# EAGLE board strobe_dsssssssssssssssss (EAGLE 6.3), part 1 of 2
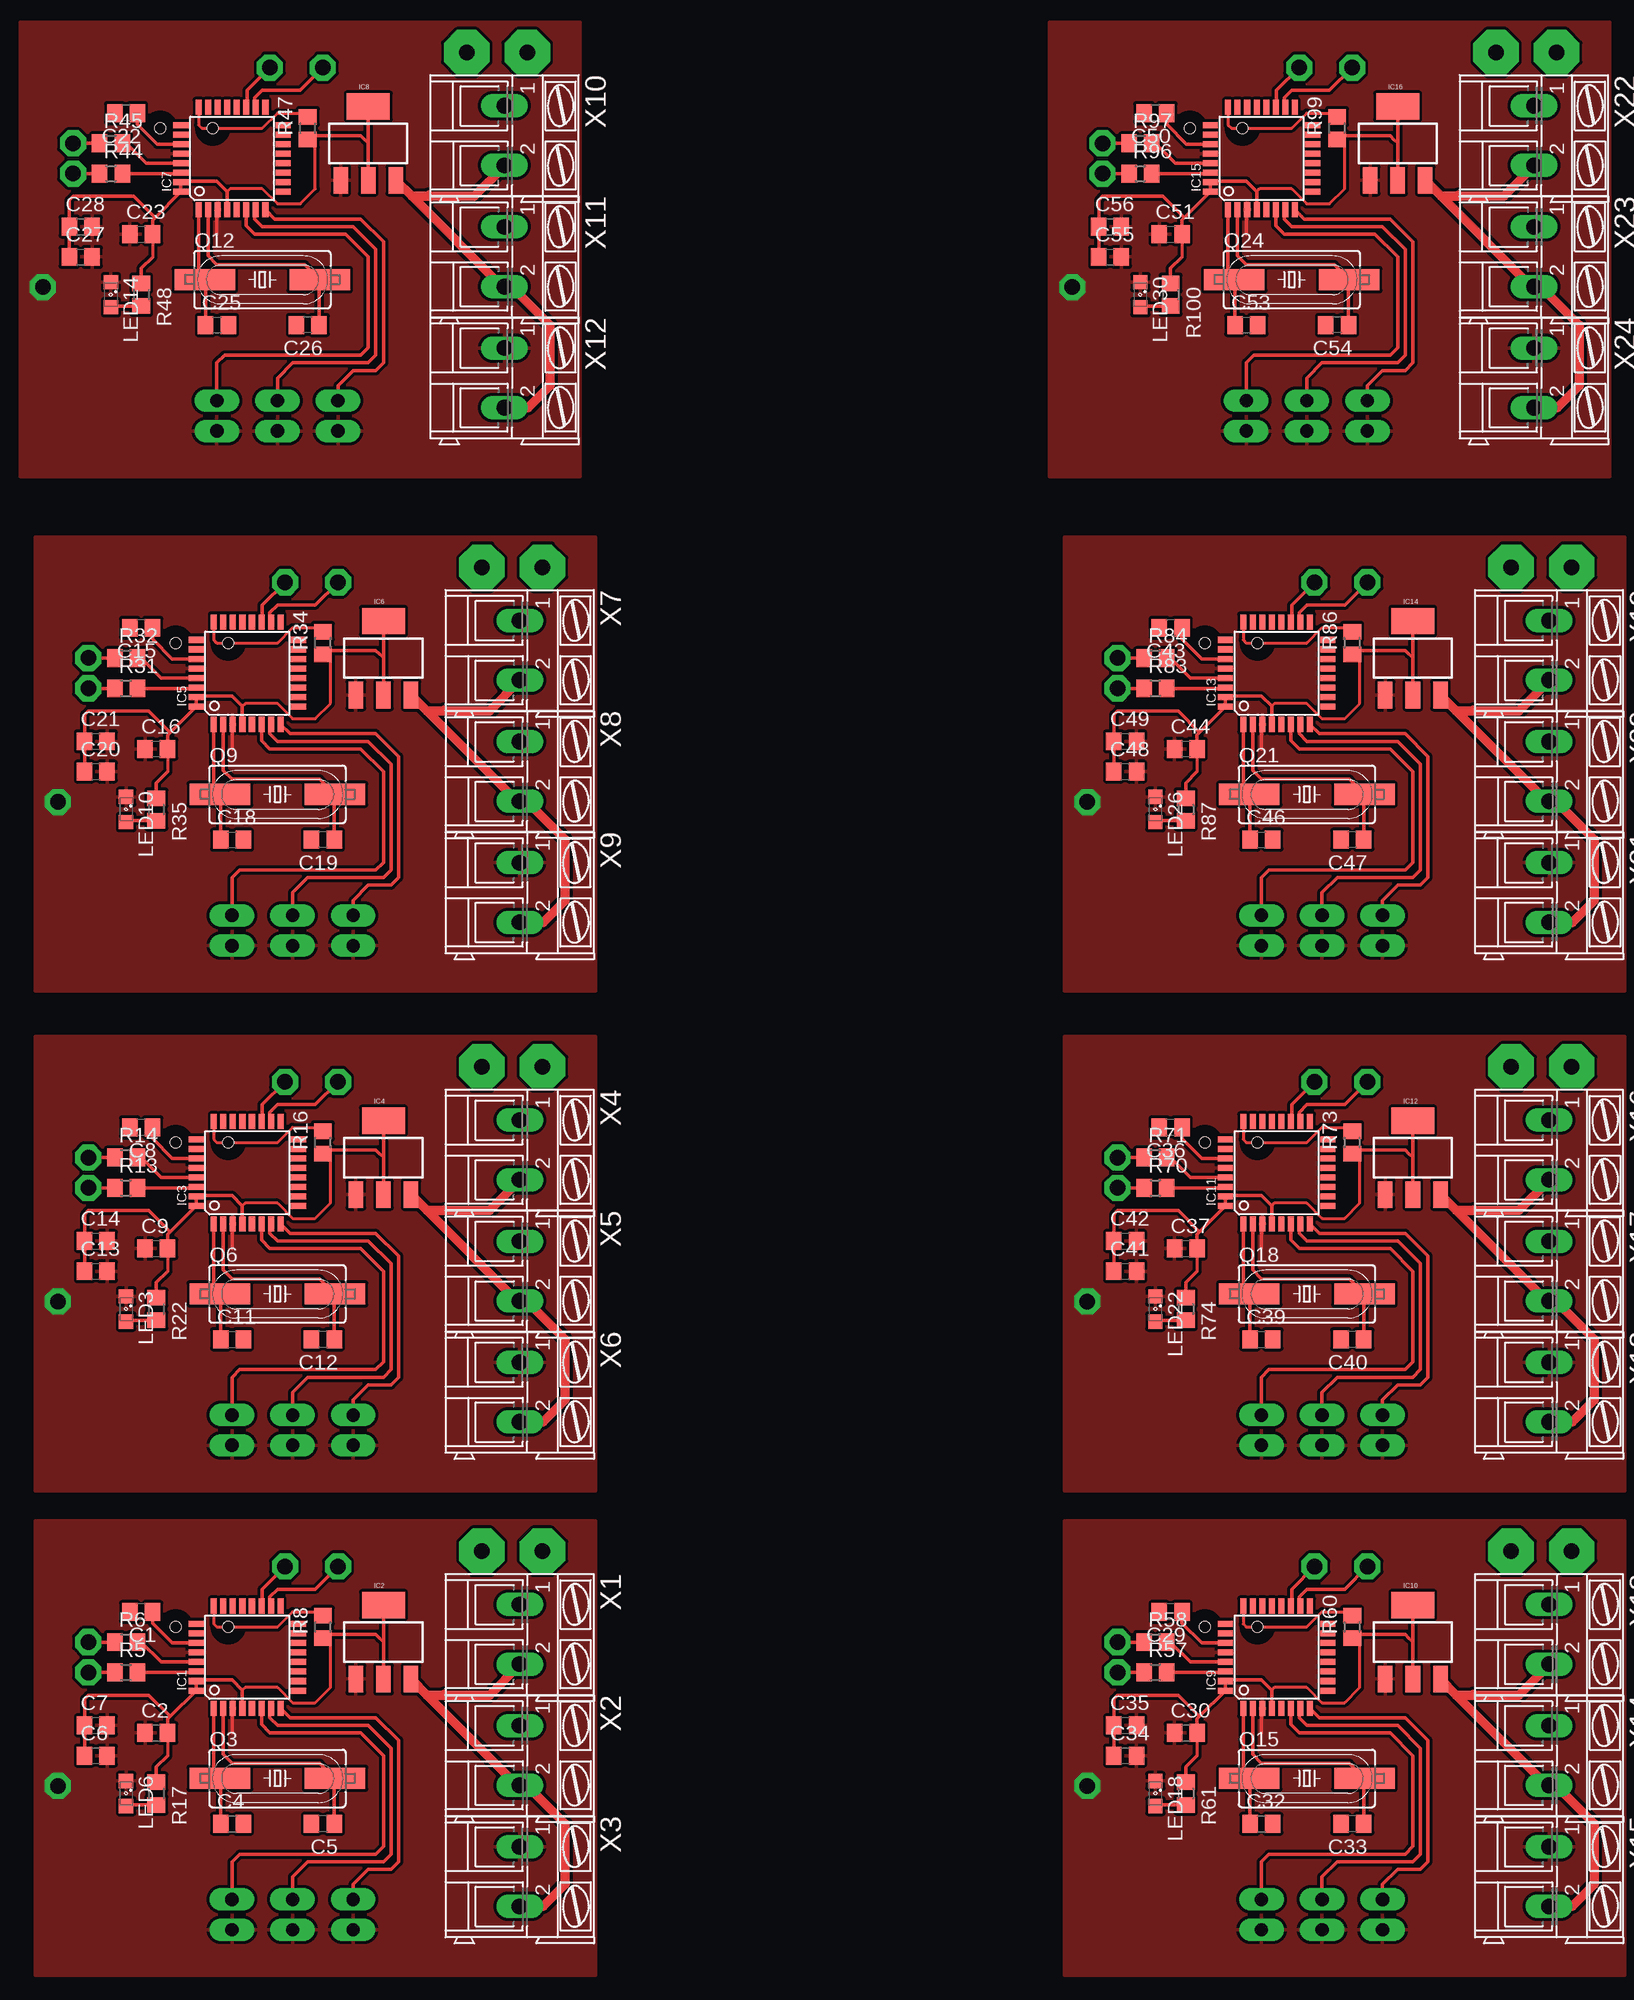
[diagram p0: board, top side]
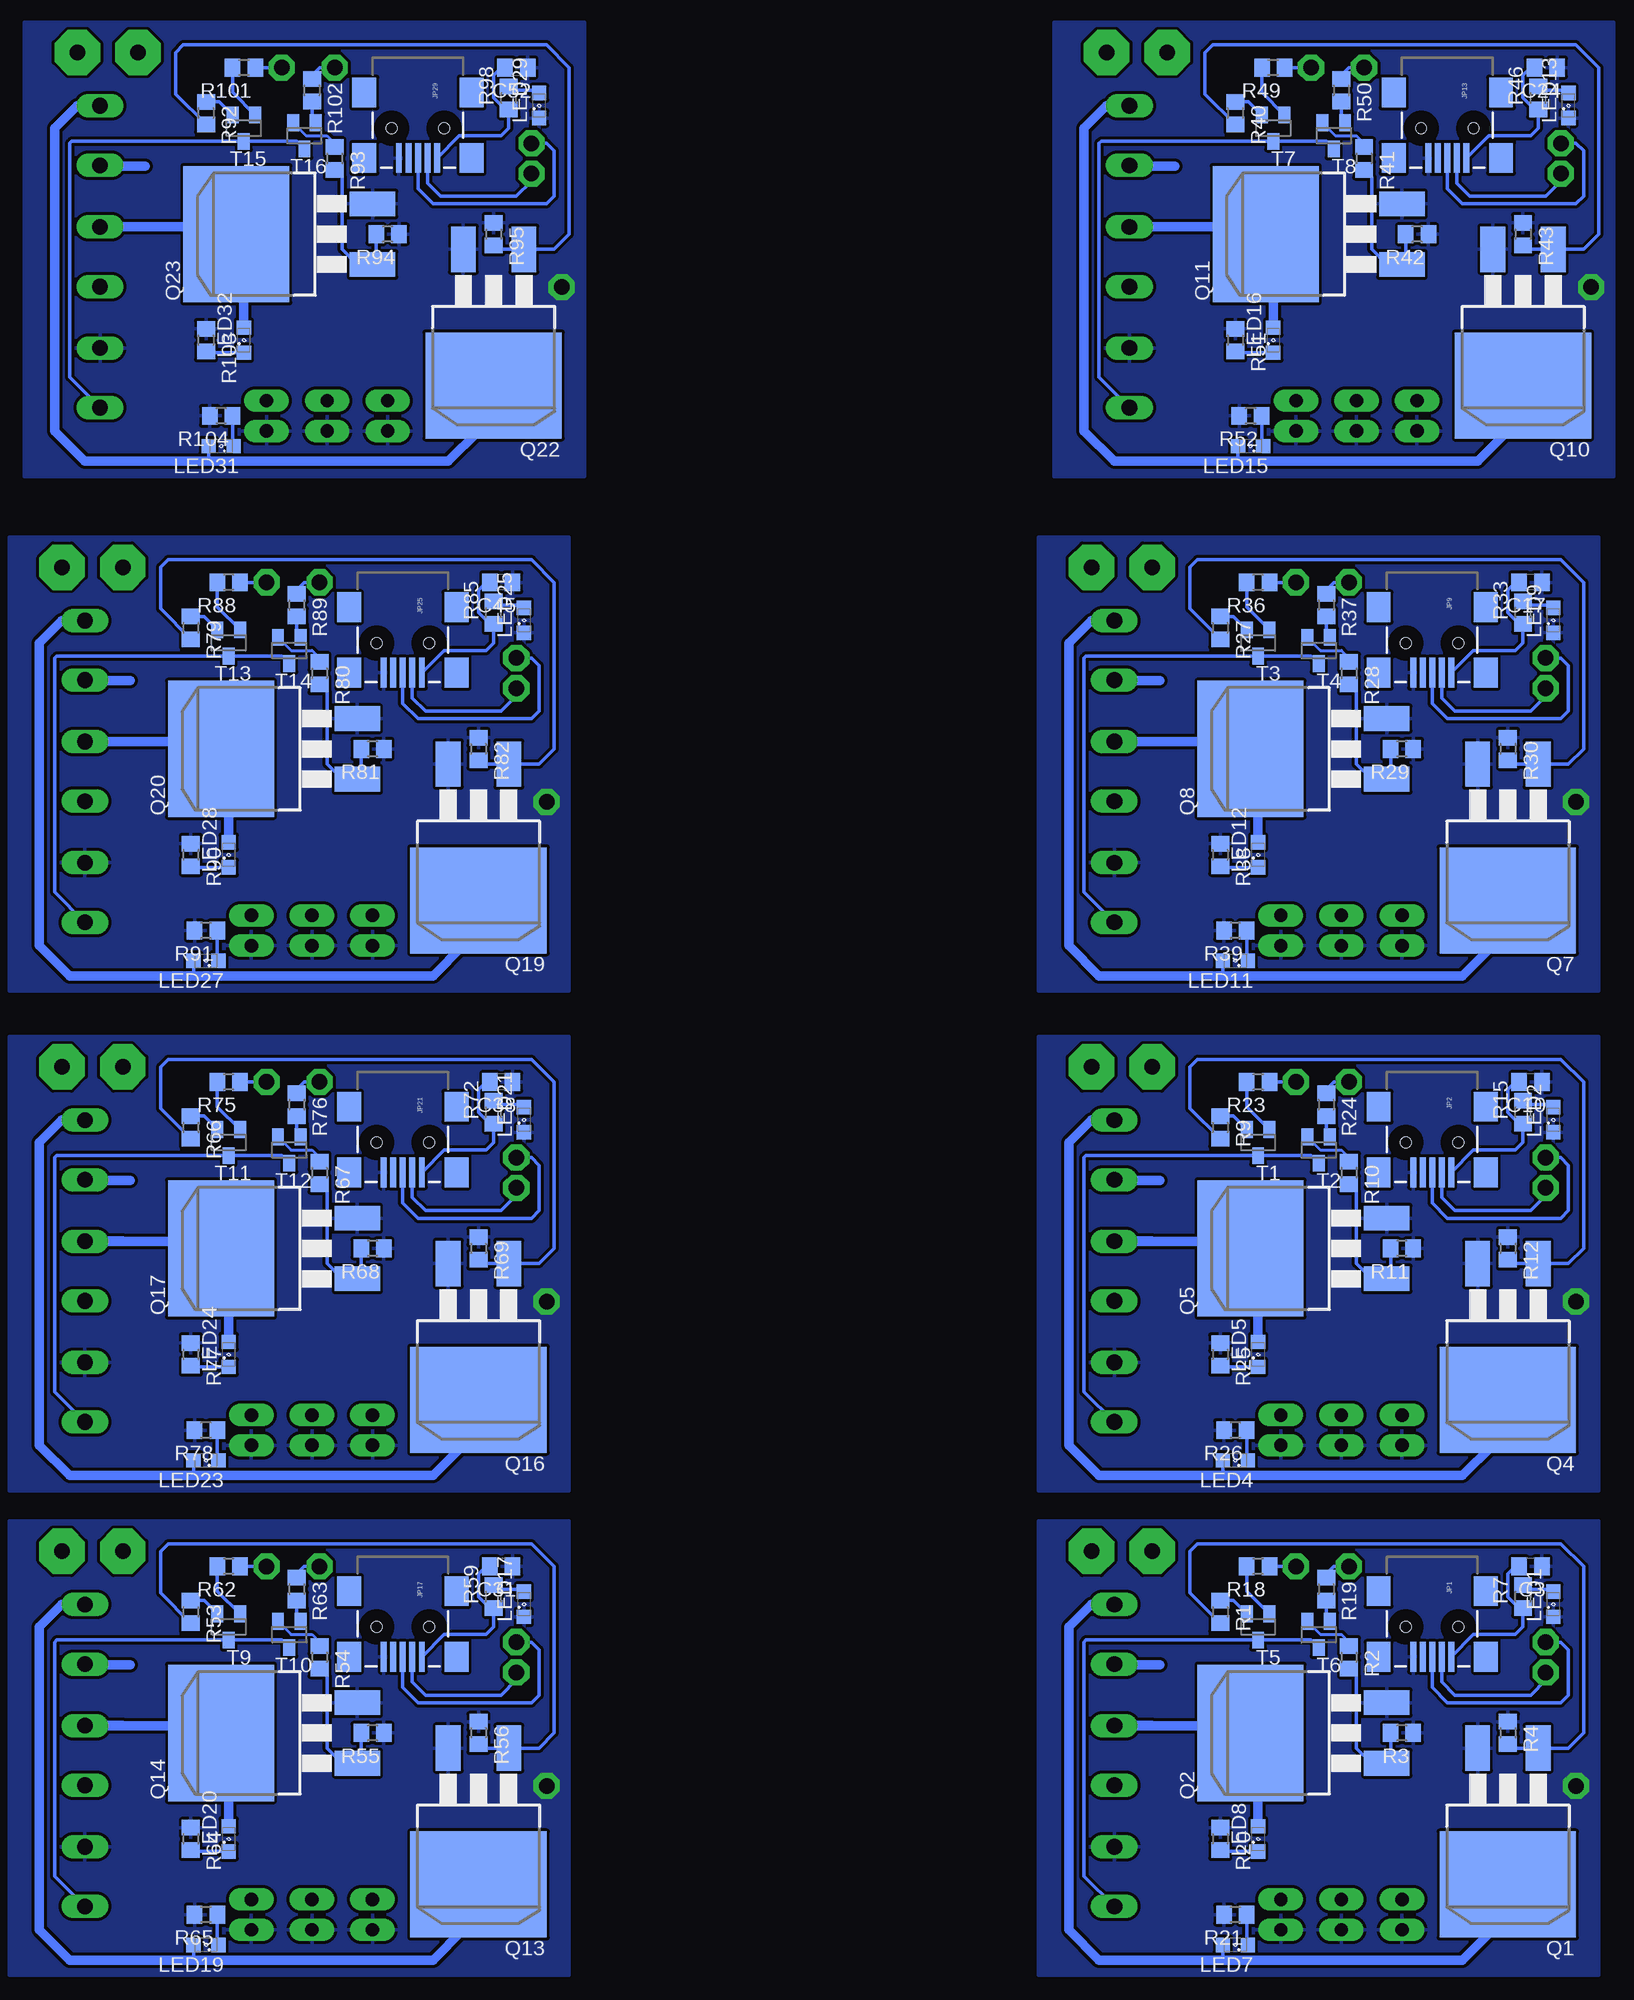
[diagram p1: board, bottom side, seen from below]

No outline drawn. Coordinates in mm, seen from the top.
Copper layers (1*16): Top 0.035mm / dielectric 1.5mm / Bottom 0.035mm
Design rules "default": minimum track width 10mil, minimum drill 24mil, track to track 8mil, track to pad 8mil, pad to pad 8mil, via to via 8mil, smd to smd 8mil, copper to edge 40mil, drill to drill 8mil, minimum pad ring 10mil, minimum via ring 8mil, stop-mask expansion 4mil, vias tented up to drill 0mil, thermal gap 10mil

## Footprints (pad centres in the part's own frame; a part is rotated, then mirrored left to right if it is on the bottom)
C0805 = smd 1.3 x 1.5: 1 -0.95,0; 2 0.95,0
TQFP32-08 = smd 1.27 x 0.508: 1 -4.293,2.8; 2 -4.293,2; 3 -4.293,1.2; 4 -4.293,0.4; 5 -4.293,-0.4; 6 -4.293,-1.2; 7 -4.293,-2; 8 -4.293,-2.8; 17 4.293,-2.8; 18 4.293,-2; 19 4.293,-1.2; 20 4.293,-0.4; 21 4.293,0.4; 22 4.293,1.2; 23 4.293,2; 24 4.293,2.8 | smd 0.508 x 1.27: 9 -2.8,-4.293; 10 -2,-4.293; 11 -1.2,-4.293; 12 -0.4,-4.293; 13 0.4,-4.293; 14 1.2,-4.293; 15 2,-4.293; 16 2.8,-4.293; 25 2.8,4.293; 26 2,4.293; 27 1.2,4.293; 28 0.4,4.293; 29 -0.4,4.293; 30 -1.2,4.293; 31 -2,4.293; 32 -2.8,4.293
SOT223 = smd 1.219 x 2.235: 1 -2.311,-3.099; 2 0,-3.099; 3 2.311,-3.099 | smd 3.6 x 2.2: 4 0,3.099
USB-MINIB = smd 2.5 x 0.5: D+ 2.5,0; D- 2.5,0.8; GND 2.5,-1.6; ID 2.5,-0.8; VBUS 2.5,1.6 | smd 2.5 x 2: MTN1 -3,4.5; MTN2 2.5,4.5; MTN3 -3,-4.5; MTN4 2.5,-4.5 | hole 0.9: 0,2.2; 0,-2.2
1X02_LONGPADS = drill 1.118 pad 1.88 long: 1 0,0; 2 2.54,0
SML0805 = smd 1.2 x 1.2: A 1.05,0; C -1.05,0
D2PACK = smd 2.083 x 3.81: 1 -2.54,-8.89; 3 2.54,-8.89 | smd 11.43 x 8.89: 2 0,2.54
SM49 = smd 5.08 x 1.778: 1 -4.826,0; 2 4.826,0
R0805 = smd 1.3 x 1.5: 1 -0.95,0; 2 0.95,0
SOT23 = smd 1 x 1.4: 1 -0.95,-1.1; 2 0.95,-1.1; 3 0,1.1
AK300/2 = drill 1.321 long: 1 -2.515,0; 2 2.489,0

## Placement (x,y rotation side)
C1  1uF  [C0805]  17.78,59.69 180 top
C2  100N  [C0805]  19.05,49.53 0 top
C3  100N  [C0805]  14.61,63.5 180 bottom
C4  22Pf  [C0805]  25.4,41.91 0 top
C5  22Pf  [C0805]  33.02,41.91 180 top
C6  100N  [C0805]  13.97,47.62 0 top
C7  100N  [C0805]  13.97,50.16 0 top
C8  1uF  [C0805]  17.78,100.33 180 top
C9  100N  [C0805]  19.05,90.17 0 top
C10  100N  [C0805]  14.61,104.14 180 bottom
C11  22Pf  [C0805]  25.4,82.55 0 top
C12  22Pf  [C0805]  33.02,82.55 180 top
C13  100N  [C0805]  13.97,88.27 0 top
C14  100N  [C0805]  13.97,90.81 0 top
C15  1uF  [C0805]  17.78,142.24 180 top
C16  100N  [C0805]  19.05,132.08 0 top
C17  100N  [C0805]  14.61,146.05 180 bottom
C18  22Pf  [C0805]  25.4,124.46 0 top
C19  22Pf  [C0805]  33.02,124.46 180 top
C20  100N  [C0805]  13.97,130.18 0 top
C21  100N  [C0805]  13.97,132.72 0 top
C22  1uF  [C0805]  16.51,185.42 180 top
C23  100N  [C0805]  17.78,175.26 0 top
C24  100N  [C0805]  13.34,189.23 180 bottom
C25  22Pf  [C0805]  24.13,167.64 0 top
C26  22Pf  [C0805]  31.75,167.64 180 top
C27  100N  [C0805]  12.7,173.35 0 top
C28  100N  [C0805]  12.7,175.9 0 top
C29  1uF  [C0805]  104.14,59.69 180 top
C30  100N  [C0805]  105.41,49.53 0 top
C31  100N  [C0805]  100.97,63.5 180 bottom
C32  22Pf  [C0805]  111.76,41.91 0 top
C33  22Pf  [C0805]  119.38,41.91 180 top
C34  100N  [C0805]  100.33,47.62 0 top
C35  100N  [C0805]  100.33,50.16 0 top
C36  1uF  [C0805]  104.14,100.33 180 top
C37  100N  [C0805]  105.41,90.17 0 top
C38  100N  [C0805]  100.97,104.14 180 bottom
C39  22Pf  [C0805]  111.76,82.55 0 top
C40  22Pf  [C0805]  119.38,82.55 180 top
C41  100N  [C0805]  100.33,88.27 0 top
C42  100N  [C0805]  100.33,90.81 0 top
C43  1uF  [C0805]  104.14,142.24 180 top
C44  100N  [C0805]  105.41,132.08 0 top
C45  100N  [C0805]  100.97,146.05 180 bottom
C46  22Pf  [C0805]  111.76,124.46 0 top
C47  22Pf  [C0805]  119.38,124.46 180 top
C48  100N  [C0805]  100.33,130.18 0 top
C49  100N  [C0805]  100.33,132.72 0 top
C50  1uF  [C0805]  102.87,185.42 180 top
C51  100N  [C0805]  104.14,175.26 0 top
C52  100N  [C0805]  99.69,189.23 180 bottom
C53  22Pf  [C0805]  110.49,167.64 0 top
C54  22Pf  [C0805]  118.11,167.64 180 top
C55  100N  [C0805]  99.06,173.35 0 top
C56  100N  [C0805]  99.06,175.9 0 top
E$1  [A4P-LOC]  -12.7,-44.45 0 top
IC1  AT90USB162A  [TQFP32-08]  26.67,55.88 90 top
IC2  [SOT223]  38.1,57.15 0 top
IC3  AT90USB162A  [TQFP32-08]  26.67,96.52 90 top
IC4  [SOT223]  38.1,97.79 0 top
IC5  AT90USB162A  [TQFP32-08]  26.67,138.43 90 top
IC6  [SOT223]  38.1,139.7 0 top
IC7  AT90USB162A  [TQFP32-08]  25.4,181.61 90 top
IC8  [SOT223]  36.83,182.88 0 top
IC9  AT90USB162A  [TQFP32-08]  113.03,55.88 90 top
IC10  [SOT223]  124.46,57.15 0 top
IC11  AT90USB162A  [TQFP32-08]  113.03,96.52 90 top
IC12  [SOT223]  124.46,97.79 0 top
IC13  AT90USB162A  [TQFP32-08]  113.03,138.43 90 top
IC14  [SOT223]  124.46,139.7 0 top
IC15  AT90USB162A  [TQFP32-08]  111.76,181.61 90 top
IC16  [SOT223]  123.19,182.88 0 top
JP1  USBSMD  [USB-MINIB]  22.86,58.42 270 bottom
JP2  USBSMD  [USB-MINIB]  22.86,99.06 270 bottom
JP3  [1X02_LONGPADS]  25.4,76.2 270 top
JP4  [1X02_LONGPADS]  25.4,35.56 270 top
JP5  [1X02_LONGPADS]  30.48,35.56 270 top
JP6  [1X02_LONGPADS]  30.48,76.2 270 top
JP7  [1X02_LONGPADS]  35.56,35.56 270 top
JP8  [1X02_LONGPADS]  35.56,76.2 270 top
JP9  USBSMD  [USB-MINIB]  22.86,140.97 270 bottom
JP10  [1X02_LONGPADS]  25.4,118.11 270 top
JP11  [1X02_LONGPADS]  30.48,118.11 270 top
JP12  [1X02_LONGPADS]  35.56,118.11 270 top
JP13  USBSMD  [USB-MINIB]  21.59,184.15 270 bottom
JP14  [1X02_LONGPADS]  24.13,161.29 270 top
JP15  [1X02_LONGPADS]  29.21,161.29 270 top
JP16  [1X02_LONGPADS]  34.29,161.29 270 top
JP17  USBSMD  [USB-MINIB]  109.22,58.42 270 bottom
JP18  [1X02_LONGPADS]  111.76,35.56 270 top
JP19  [1X02_LONGPADS]  116.84,35.56 270 top
JP20  [1X02_LONGPADS]  121.92,35.56 270 top
JP21  USBSMD  [USB-MINIB]  109.22,99.06 270 bottom
JP22  [1X02_LONGPADS]  111.76,76.2 270 top
JP23  [1X02_LONGPADS]  116.84,76.2 270 top
JP24  [1X02_LONGPADS]  121.92,76.2 270 top
JP25  USBSMD  [USB-MINIB]  109.22,140.97 270 bottom
JP26  [1X02_LONGPADS]  111.76,118.11 270 top
JP27  [1X02_LONGPADS]  116.84,118.11 270 top
JP28  [1X02_LONGPADS]  121.92,118.11 270 top
JP29  USBSMD  [USB-MINIB]  107.95,184.15 270 bottom
JP30  [1X02_LONGPADS]  110.49,161.29 270 top
JP31  [1X02_LONGPADS]  115.57,161.29 270 top
JP32  [1X02_LONGPADS]  120.65,161.29 270 top
LED1  [SML0805]  12.7,60.33 90 bottom
LED2  [SML0805]  12.7,100.97 90 bottom
LED3  [SML0805]  16.51,85.09 270 top
LED4  [SML0805]  39.37,72.39 180 bottom
LED5  [SML0805]  37.47,81.28 90 bottom
LED6  [SML0805]  16.51,44.45 270 top
LED7  [SML0805]  39.37,31.75 180 bottom
LED8  [SML0805]  37.47,40.64 90 bottom
LED9  [SML0805]  12.7,142.88 90 bottom
LED10  [SML0805]  16.51,127 270 top
LED11  [SML0805]  39.37,114.3 180 bottom
LED12  [SML0805]  37.47,123.19 90 bottom
LED13  [SML0805]  11.43,186.06 90 bottom
LED14  [SML0805]  15.24,170.18 270 top
LED15  [SML0805]  38.1,157.48 180 bottom
LED16  [SML0805]  36.2,166.37 90 bottom
LED17  [SML0805]  99.06,60.33 90 bottom
LED18  [SML0805]  102.87,44.45 270 top
LED19  [SML0805]  125.73,31.75 180 bottom
LED20  [SML0805]  123.83,40.64 90 bottom
LED21  [SML0805]  99.06,100.97 90 bottom
LED22  [SML0805]  102.87,85.09 270 top
LED23  [SML0805]  125.73,72.39 180 bottom
LED24  [SML0805]  123.83,81.28 90 bottom
LED25  [SML0805]  99.06,142.88 90 bottom
LED26  [SML0805]  102.87,127 270 top
LED27  [SML0805]  125.73,114.3 180 bottom
LED28  [SML0805]  123.83,123.19 90 bottom
LED29  [SML0805]  97.79,186.06 90 bottom
LED30  [SML0805]  101.6,170.18 270 top
LED31  [SML0805]  124.46,157.48 180 bottom
LED32  [SML0805]  122.56,166.37 90 bottom
Q1  IRF3704S  [D2PACK]  16.51,39.37 180 bottom
Q2  IRF3704S  [D2PACK]  35.56,49.53 90 bottom
Q3  [SM49]  29.21,45.72 0 top
Q4  IRF3704S  [D2PACK]  16.51,80.01 180 bottom
Q5  IRF3704S  [D2PACK]  35.56,90.17 90 bottom
Q6  [SM49]  29.21,86.36 0 top
Q7  IRF3704S  [D2PACK]  16.51,121.92 180 bottom
Q8  IRF3704S  [D2PACK]  35.56,132.08 90 bottom
Q9  [SM49]  29.21,128.27 0 top
Q10  IRF3704S  [D2PACK]  15.24,165.1 180 bottom
Q11  IRF3704S  [D2PACK]  34.29,175.26 90 bottom
Q12  [SM49]  27.94,171.45 0 top
Q13  IRF3704S  [D2PACK]  102.87,39.37 180 bottom
Q14  IRF3704S  [D2PACK]  121.92,49.53 90 bottom
Q15  [SM49]  115.57,45.72 0 top
Q16  IRF3704S  [D2PACK]  102.87,80.01 180 bottom
Q17  IRF3704S  [D2PACK]  121.92,90.17 90 bottom
Q18  [SM49]  115.57,86.36 0 top
Q19  IRF3704S  [D2PACK]  102.87,121.92 180 bottom
Q20  IRF3704S  [D2PACK]  121.92,132.08 90 bottom
Q21  [SM49]  115.57,128.27 0 top
Q22  IRF3704S  [D2PACK]  101.6,165.1 180 bottom
Q23  IRF3704S  [D2PACK]  120.65,175.26 90 bottom
Q24  [SM49]  114.3,171.45 0 top
R1  [R0805]  40.64,59.69 270 bottom
R2  [R0805]  29.84,55.88 270 bottom
R3  [R0805]  25.4,49.53 180 bottom
R4  [R0805]  16.51,49.53 270 bottom
R5  22  [R0805]  16.51,54.61 0 top
R6  22  [R0805]  16.51,57.15 0 top
R7  340  [R0805]  15.24,60.96 90 bottom
R8  10K  [R0805]  33.02,58.42 90 top
R9  [R0805]  40.64,100.33 270 bottom
R10  [R0805]  29.84,96.52 270 bottom
R11  [R0805]  25.4,90.17 180 bottom
R12  [R0805]  16.51,90.17 270 bottom
R13  22  [R0805]  16.51,95.25 0 top
R14  22  [R0805]  16.51,97.79 0 top
R15  340  [R0805]  15.24,101.6 90 bottom
R16  10K  [R0805]  33.02,99.06 90 top
R17  340  [R0805]  19.05,44.45 270 top
R18  [R0805]  37.47,63.5 180 bottom
R19  [R0805]  31.75,61.59 270 bottom
R20  [R0805]  40.64,40.64 270 bottom
R21  [R0805]  39.37,34.29 180 bottom
R22  340  [R0805]  19.05,85.09 270 top
R23  [R0805]  37.47,104.14 180 bottom
R24  [R0805]  31.75,102.23 270 bottom
R25  [R0805]  40.64,81.28 270 bottom
R26  [R0805]  39.37,74.93 180 bottom
R27  [R0805]  40.64,142.24 270 bottom
R28  [R0805]  29.84,138.43 270 bottom
R29  [R0805]  25.4,132.08 180 bottom
R30  [R0805]  16.51,132.08 270 bottom
R31  22  [R0805]  16.51,137.16 0 top
R32  22  [R0805]  16.51,139.7 0 top
R33  340  [R0805]  15.24,143.51 90 bottom
R34  10K  [R0805]  33.02,140.97 90 top
R35  340  [R0805]  19.05,127 270 top
R36  [R0805]  37.47,146.05 180 bottom
R37  [R0805]  31.75,144.15 270 bottom
R38  [R0805]  40.64,123.19 270 bottom
R39  [R0805]  39.37,116.84 180 bottom
R40  [R0805]  39.37,185.42 270 bottom
R41  [R0805]  28.57,181.61 270 bottom
R42  [R0805]  24.13,175.26 180 bottom
R43  [R0805]  15.24,175.26 270 bottom
R44  22  [R0805]  15.24,180.34 0 top
R45  22  [R0805]  15.24,182.88 0 top
R46  340  [R0805]  13.97,186.69 90 bottom
R47  10K  [R0805]  31.75,184.15 90 top
R48  340  [R0805]  17.78,170.18 270 top
R49  [R0805]  36.2,189.23 180 bottom
R50  [R0805]  30.48,187.32 270 bottom
R51  [R0805]  39.37,166.37 270 bottom
R52  [R0805]  38.1,160.02 180 bottom
R53  [R0805]  127,59.69 270 bottom
R54  [R0805]  116.2,55.88 270 bottom
R55  [R0805]  111.76,49.53 180 bottom
R56  [R0805]  102.87,49.53 270 bottom
R57  22  [R0805]  102.87,54.61 0 top
R58  22  [R0805]  102.87,57.15 0 top
R59  340  [R0805]  101.6,60.96 90 bottom
R60  10K  [R0805]  119.38,58.42 90 top
R61  340  [R0805]  105.41,44.45 270 top
R62  [R0805]  123.83,63.5 180 bottom
R63  [R0805]  118.11,61.59 270 bottom
R64  [R0805]  127,40.64 270 bottom
R65  [R0805]  125.73,34.29 180 bottom
R66  [R0805]  127,100.33 270 bottom
R67  [R0805]  116.2,96.52 270 bottom
R68  [R0805]  111.76,90.17 180 bottom
R69  [R0805]  102.87,90.17 270 bottom
R70  22  [R0805]  102.87,95.25 0 top
R71  22  [R0805]  102.87,97.79 0 top
R72  340  [R0805]  101.6,101.6 90 bottom
R73  10K  [R0805]  119.38,99.06 90 top
R74  340  [R0805]  105.41,85.09 270 top
R75  [R0805]  123.83,104.14 180 bottom
R76  [R0805]  118.11,102.23 270 bottom
R77  [R0805]  127,81.28 270 bottom
R78  [R0805]  125.73,74.93 180 bottom
R79  [R0805]  127,142.24 270 bottom
R80  [R0805]  116.2,138.43 270 bottom
R81  [R0805]  111.76,132.08 180 bottom
R82  [R0805]  102.87,132.08 270 bottom
R83  22  [R0805]  102.87,137.16 0 top
R84  22  [R0805]  102.87,139.7 0 top
R85  340  [R0805]  101.6,143.51 90 bottom
R86  10K  [R0805]  119.38,140.97 90 top
R87  340  [R0805]  105.41,127 270 top
R88  [R0805]  123.83,146.05 180 bottom
R89  [R0805]  118.11,144.15 270 bottom
R90  [R0805]  127,123.19 270 bottom
R91  [R0805]  125.73,116.84 180 bottom
R92  [R0805]  125.73,185.42 270 bottom
R93  [R0805]  114.94,181.61 270 bottom
R94  [R0805]  110.49,175.26 180 bottom
R95  [R0805]  101.6,175.26 270 bottom
R96  22  [R0805]  101.6,180.34 0 top
R97  22  [R0805]  101.6,182.88 0 top
R98  340  [R0805]  100.33,186.69 90 bottom
R99  10K  [R0805]  118.11,184.15 90 top
R100  340  [R0805]  104.14,170.18 270 top
R101  [R0805]  122.56,189.23 180 bottom
R102  [R0805]  116.84,187.32 270 bottom
R103  [R0805]  125.73,166.37 270 bottom
R104  [R0805]  124.46,160.02 180 bottom
T1  BC849  [SOT23]  37.47,99.06 180 bottom
T2  BC849  [SOT23]  32.38,98.42 180 bottom
T3  BC849  [SOT23]  37.47,140.97 180 bottom
T4  BC849  [SOT23]  32.38,140.34 180 bottom
T5  BC849  [SOT23]  37.47,58.42 180 bottom
T6  BC849  [SOT23]  32.38,57.78 180 bottom
T7  BC849  [SOT23]  36.2,184.15 180 bottom
T8  BC849  [SOT23]  31.11,183.51 180 bottom
T9  BC849  [SOT23]  123.83,58.42 180 bottom
T10  BC849  [SOT23]  118.75,57.78 180 bottom
T11  BC849  [SOT23]  123.83,99.06 180 bottom
T12  BC849  [SOT23]  118.75,98.42 180 bottom
T13  BC849  [SOT23]  123.83,140.97 180 bottom
T14  BC849  [SOT23]  118.75,140.34 180 bottom
T15  BC849  [SOT23]  122.56,184.15 180 bottom
T16  BC849  [SOT23]  117.47,183.51 180 bottom
X1  [AK300/2]  49.53,57.78 270 top
X2  [AK300/2]  49.53,47.62 270 top
X3  [AK300/2]  49.53,37.47 270 top
X4  [AK300/2]  49.53,98.42 270 top
X5  [AK300/2]  49.53,88.27 270 top
X6  [AK300/2]  49.53,78.11 270 top
X7  [AK300/2]  49.53,140.34 270 top
X8  [AK300/2]  49.53,130.18 270 top
X9  [AK300/2]  49.53,120.02 270 top
X10  [AK300/2]  48.26,183.51 270 top
X11  [AK300/2]  48.26,173.35 270 top
X12  [AK300/2]  48.26,163.19 270 top
X13  [AK300/2]  135.89,57.78 270 top
X14  [AK300/2]  135.89,47.62 270 top
X15  [AK300/2]  135.89,37.47 270 top
X16  [AK300/2]  135.89,98.42 270 top
X17  [AK300/2]  135.89,88.27 270 top
X18  [AK300/2]  135.89,78.11 270 top
X19  [AK300/2]  135.89,140.34 270 top
X20  [AK300/2]  135.89,130.18 270 top
X21  [AK300/2]  135.89,120.02 270 top
X22  [AK300/2]  134.62,183.51 270 top
X23  [AK300/2]  134.62,173.35 270 top
X24  [AK300/2]  134.62,163.19 270 top

## Library data of the parts
C1-C56 R1-R104 = rcl
E$1 = frames
IC1 IC3 IC5 IC7 IC9 IC11 IC13 IC15 = adafruit
IC2 IC4 IC6 IC8 IC10 IC12 IC14 IC16 = SparkFun-PowerIC
JP1-JP32 = SparkFun-Connectors
LED1-LED32 = led
Q1 Q2 Q4 Q5 Q7 Q8 Q10 Q11 Q13 Q14 Q16 Q17 Q19 Q20 Q22 Q23 = transistor-power
Q3 Q6 Q9 Q12 Q15 Q18 Q21 Q24 = crystal; OC_FARNELL: unknown; OC_NEWARK: unknown
T1-T16 = transistor
X1-X24 = con-ptr500; OC_FARNELL: unknown; OC_NEWARK: unknown

## Nets
5V: C2.2 C6.1 C7.1 IC1.4 IC1.31 IC1.32 IC2.2 IC2.4 R8.1 R17.1
5V1: C9.2 C13.1 C14.1 IC3.4 IC3.31 IC3.32 IC4.2 IC4.4 R16.1 R22.1
5V2: C16.2 C20.1 C21.1 IC5.4 IC5.31 IC5.32 IC6.2 IC6.4 R34.1 R35.1
5V3: C23.2 C27.1 C28.1 IC7.4 IC7.31 IC7.32 IC8.2 IC8.4 R47.1 R48.1
5V4: C30.2 C34.1 C35.1 IC9.4 IC9.31 IC9.32 IC10.2 IC10.4 R60.1 R61.1
5V5: C37.2 C41.1 C42.1 IC11.4 IC11.31 IC11.32 IC12.2 IC12.4 R73.1 R74.1
5V6: C44.2 C48.1 C49.1 IC13.4 IC13.31 IC13.32 IC14.2 IC14.4 R86.1 R87.1
5V7: C51.2 C55.1 C56.1 IC15.4 IC15.31 IC15.32 IC16.2 IC16.4 R99.1 R100.1
12V: IC2.3 T5.3 T6.3 X1.2 X2.2 X3.2
12V1: IC4.3 T1.3 T2.3 X4.2 X5.2 X6.2
12V2: IC6.3 T3.3 T4.3 X7.2 X8.2 X9.2
12V3: IC8.3 T7.3 T8.3 X10.2 X11.2 X12.2
12V4: IC10.3 T9.3 T10.3 X13.2 X14.2 X15.2
12V5: IC12.3 T11.3 T12.3 X16.2 X17.2 X18.2
12V6: IC14.3 T13.3 T14.3 X19.2 X20.2 X21.2
12V7: IC16.3 T15.3 T16.3 X22.2 X23.2 X24.2
B1: IC1.6 JP4.1
B2: IC1.7 JP5.1
B3: IC1.8 JP7.1
B4: IC3.6 JP3.1
B5: IC3.7 JP6.1
B6: IC3.8 JP8.1
B7: IC5.6 JP10.1
B8: IC5.7 JP11.1
B9: IC5.8 JP12.1
B10: IC7.6 JP14.1
B11: IC7.7 JP15.1
B12: IC7.8 JP16.1
B13: IC9.6 JP18.1
B14: IC9.7 JP19.1
B15: IC9.8 JP20.1
B16: IC11.6 JP22.1
B17: IC11.7 JP23.1
B18: IC11.8 JP24.1
B19: IC13.6 JP26.1
B20: IC13.7 JP27.1
B21: IC13.8 JP28.1
B22: IC15.6 JP30.1
B23: IC15.7 JP31.1
B24: IC15.8 JP32.1
CH1: IC1.18 R18.1
CH2: IC1.19 R19.1
CH3: IC3.18 R23.1
CH4: IC3.19 R24.1
CH5: IC5.18 R36.1
CH6: IC5.19 R37.1
CH7: IC7.18 R49.1
CH8: IC7.19 R50.1
CH9: IC9.18 R62.1
CH10: IC9.19 R63.1
CH11: IC11.18 R75.1
CH12: IC11.19 R76.1
CH13: IC13.18 R88.1
CH14: IC13.19 R89.1
CH15: IC15.18 R101.1
CH16: IC15.19 R102.1
GND: C2.1 C3.1 C6.2 C7.2 IC1.3 IC1.28 IC2.1 JP1.GND JP4.2 JP5.2 JP7.2 LED1.C LED6.C Q1.3 Q2.3 R3.1 R4.1 R20.1 R21.2 X3.1
GND1: C9.1 C10.1 C13.2 C14.2 IC3.3 IC3.28 IC4.1 JP2.GND JP3.2 JP6.2 JP8.2 LED2.C LED3.C Q4.3 Q5.3 R11.1 R12.1 R25.1 R26.2 X6.1
GND2: C16.1 C17.1 C20.2 C21.2 IC5.3 IC5.28 IC6.1 JP9.GND JP10.2 JP11.2 JP12.2 LED9.C LED10.C Q7.3 Q8.3 R29.1 R30.1 R38.1 R39.2 X9.1
GND3: C23.1 C24.1 C27.2 C28.2 IC7.3 IC7.28 IC8.1 JP13.GND JP14.2 JP15.2 JP16.2 LED13.C LED14.C Q10.3 Q11.3 R42.1 R43.1 R51.1 R52.2 X12.1
GND4: C30.1 C31.1 C34.2 C35.2 IC9.3 IC9.28 IC10.1 JP17.GND JP18.2 JP19.2 JP20.2 LED17.C LED18.C Q13.3 Q14.3 R55.1 R56.1 R64.1 R65.2 X15.1
GND5: C37.1 C38.1 C41.2 C42.2 IC11.3 IC11.28 IC12.1 JP21.GND JP22.2 JP23.2 JP24.2 LED21.C LED22.C Q16.3 Q17.3 R68.1 R69.1 R77.1 R78.2 X18.1
GND6: C44.1 C45.1 C48.2 C49.2 IC13.3 IC13.28 IC14.1 JP25.GND JP26.2 JP27.2 JP28.2 LED25.C LED26.C Q19.3 Q20.3 R81.1 R82.1 R90.1 R91.2 X21.1
GND7: C51.1 C52.1 C55.2 C56.2 IC15.3 IC15.28 IC16.1 JP29.GND JP30.2 JP31.2 JP32.2 LED29.C LED30.C Q22.3 Q23.3 R94.1 R95.1 R103.1 R104.2 X24.1
N$1: Q1.1 R1.2 R4.2
N$2: Q2.1 R2.2 R3.2
N$3: LED7.A Q1.2 X1.1
N$4: LED8.A Q2.2 X2.1
N$5: C1.1 IC1.27
N$6: JP1.D+ R6.1
N$7: JP1.D- R5.1
N$8: IC1.30 R5.2
N$9: IC1.29 R6.2
N$10: LED1.A R7.2
N$11: C3.2 JP1.VBUS R7.1
N$12: C5.1 IC1.2 Q3.2
N$13: C4.1 IC1.1 Q3.1
N$14: IC1.24 R8.2
N$17: Q4.1 R9.2 R12.2
N$18: Q5.1 R10.2 R11.2
N$19: LED4.A Q4.2 X4.1
N$20: LED5.A Q5.2 X5.1
N$21: C8.1 IC3.27
N$22: JP2.D+ R14.1
N$23: JP2.D- R13.1
N$24: IC3.30 R13.2
N$25: IC3.29 R14.2
N$26: C10.2 JP2.VBUS R15.1
N$27: LED6.A R17.2
N$28: R1.1 T5.2
N$29: R2.1 T6.2
N$30: R18.2 T5.1
N$31: R19.2 T6.1
N$32: LED8.C R20.2
N$33: LED7.C R21.1
N$34: LED2.A R15.2
N$35: C12.1 IC3.2 Q6.2
N$36: C11.1 IC3.1 Q6.1
N$37: IC3.24 R16.2
N$38: LED3.A R22.2
N$39: R9.1 T1.2
N$40: R10.1 T2.2
N$41: R23.2 T1.1
N$42: R24.2 T2.1
N$43: LED5.C R25.2
N$44: LED4.C R26.1
N$47: Q7.1 R27.2 R30.2
N$48: Q8.1 R28.2 R29.2
N$49: LED11.A Q7.2 X7.1
N$50: LED12.A Q8.2 X8.1
N$51: C15.1 IC5.27
N$52: JP9.D+ R32.1
N$53: JP9.D- R31.1
N$54: IC5.30 R31.2
N$55: IC5.29 R32.2
N$56: C17.2 JP9.VBUS R33.1
N$57: LED9.A R33.2
N$58: C19.1 IC5.2 Q9.2
N$59: C18.1 IC5.1 Q9.1
N$60: IC5.24 R34.2
N$61: LED10.A R35.2
N$62: R27.1 T3.2
N$63: R28.1 T4.2
N$64: R36.2 T3.1
N$65: R37.2 T4.1
N$66: LED12.C R38.2
N$67: LED11.C R39.1
N$70: Q10.1 R40.2 R43.2
N$71: Q11.1 R41.2 R42.2
N$72: LED15.A Q10.2 X10.1
N$73: LED16.A Q11.2 X11.1
N$74: C22.1 IC7.27
N$75: JP13.D+ R45.1
N$76: JP13.D- R44.1
N$77: IC7.30 R44.2
N$78: IC7.29 R45.2
N$79: C24.2 JP13.VBUS R46.1
N$80: LED13.A R46.2
N$81: C26.1 IC7.2 Q12.2
N$82: C25.1 IC7.1 Q12.1
N$83: IC7.24 R47.2
N$84: LED14.A R48.2
N$85: R40.1 T7.2
N$86: R41.1 T8.2
N$87: R49.2 T7.1
N$88: R50.2 T8.1
N$89: LED16.C R51.2
N$90: LED15.C R52.1
N$93: Q13.1 R53.2 R56.2
N$94: Q14.1 R54.2 R55.2
N$95: LED19.A Q13.2 X13.1
N$96: LED20.A Q14.2 X14.1
N$97: C29.1 IC9.27
N$98: JP17.D+ R58.1
N$99: JP17.D- R57.1
N$100: IC9.30 R57.2
N$101: IC9.29 R58.2
N$102: C31.2 JP17.VBUS R59.1
N$103: LED17.A R59.2
N$104: C33.1 IC9.2 Q15.2
N$105: C32.1 IC9.1 Q15.1
N$106: IC9.24 R60.2
N$107: LED18.A R61.2
N$108: R53.1 T9.2
N$109: R54.1 T10.2
N$110: R62.2 T9.1
N$111: R63.2 T10.1
N$112: LED20.C R64.2
N$113: LED19.C R65.1
N$116: Q16.1 R66.2 R69.2
N$117: Q17.1 R67.2 R68.2
N$118: LED23.A Q16.2 X16.1
N$119: LED24.A Q17.2 X17.1
N$120: C36.1 IC11.27
N$121: JP21.D+ R71.1
N$122: JP21.D- R70.1
N$123: IC11.30 R70.2
N$124: IC11.29 R71.2
N$125: C38.2 JP21.VBUS R72.1
N$126: LED21.A R72.2
N$127: C40.1 IC11.2 Q18.2
N$128: C39.1 IC11.1 Q18.1
N$129: IC11.24 R73.2
N$130: LED22.A R74.2
N$131: R66.1 T11.2
N$132: R67.1 T12.2
N$133: R75.2 T11.1
N$134: R76.2 T12.1
N$135: LED24.C R77.2
N$136: LED23.C R78.1
N$139: Q19.1 R79.2 R82.2
N$140: Q20.1 R80.2 R81.2
N$141: LED27.A Q19.2 X19.1
N$142: LED28.A Q20.2 X20.1
N$143: C43.1 IC13.27
N$144: JP25.D+ R84.1
N$145: JP25.D- R83.1
N$146: IC13.30 R83.2
N$147: IC13.29 R84.2
N$148: C45.2 JP25.VBUS R85.1
N$149: LED25.A R85.2
N$150: C47.1 IC13.2 Q21.2
N$151: C46.1 IC13.1 Q21.1
N$152: IC13.24 R86.2
N$153: LED26.A R87.2
N$154: R79.1 T13.2
N$155: R80.1 T14.2
N$156: R88.2 T13.1
N$157: R89.2 T14.1
N$158: LED28.C R90.2
N$159: LED27.C R91.1
N$162: Q22.1 R92.2 R95.2
N$163: Q23.1 R93.2 R94.2
N$164: LED31.A Q22.2 X22.1
N$165: LED32.A Q23.2 X23.1
N$166: C50.1 IC15.27
N$167: JP29.D+ R97.1
N$168: JP29.D- R96.1
N$169: IC15.30 R96.2
N$170: IC15.29 R97.2
N$171: C52.2 JP29.VBUS R98.1
N$172: LED29.A R98.2
N$173: C54.1 IC15.2 Q24.2
N$174: C53.1 IC15.1 Q24.1
N$175: IC15.24 R99.2
N$176: LED30.A R100.2
N$177: R92.1 T15.2
N$178: R93.1 T16.2
N$179: R101.2 T15.1
N$180: R102.2 T16.1
N$181: LED32.C R103.2
N$182: LED31.C R104.1
O1: IC1.21
O2: IC1.20
O3: IC3.20
O4: IC3.21
O5: IC5.20
O6: IC5.21
O7: IC7.20
O8: IC7.21
O9: IC9.20
O10: IC9.21
O11: IC11.20
O12: IC11.21
O13: IC13.20
O14: IC13.21
O15: IC15.20
O16: IC15.21